# Allegro board DA_CONVERTOR.brd
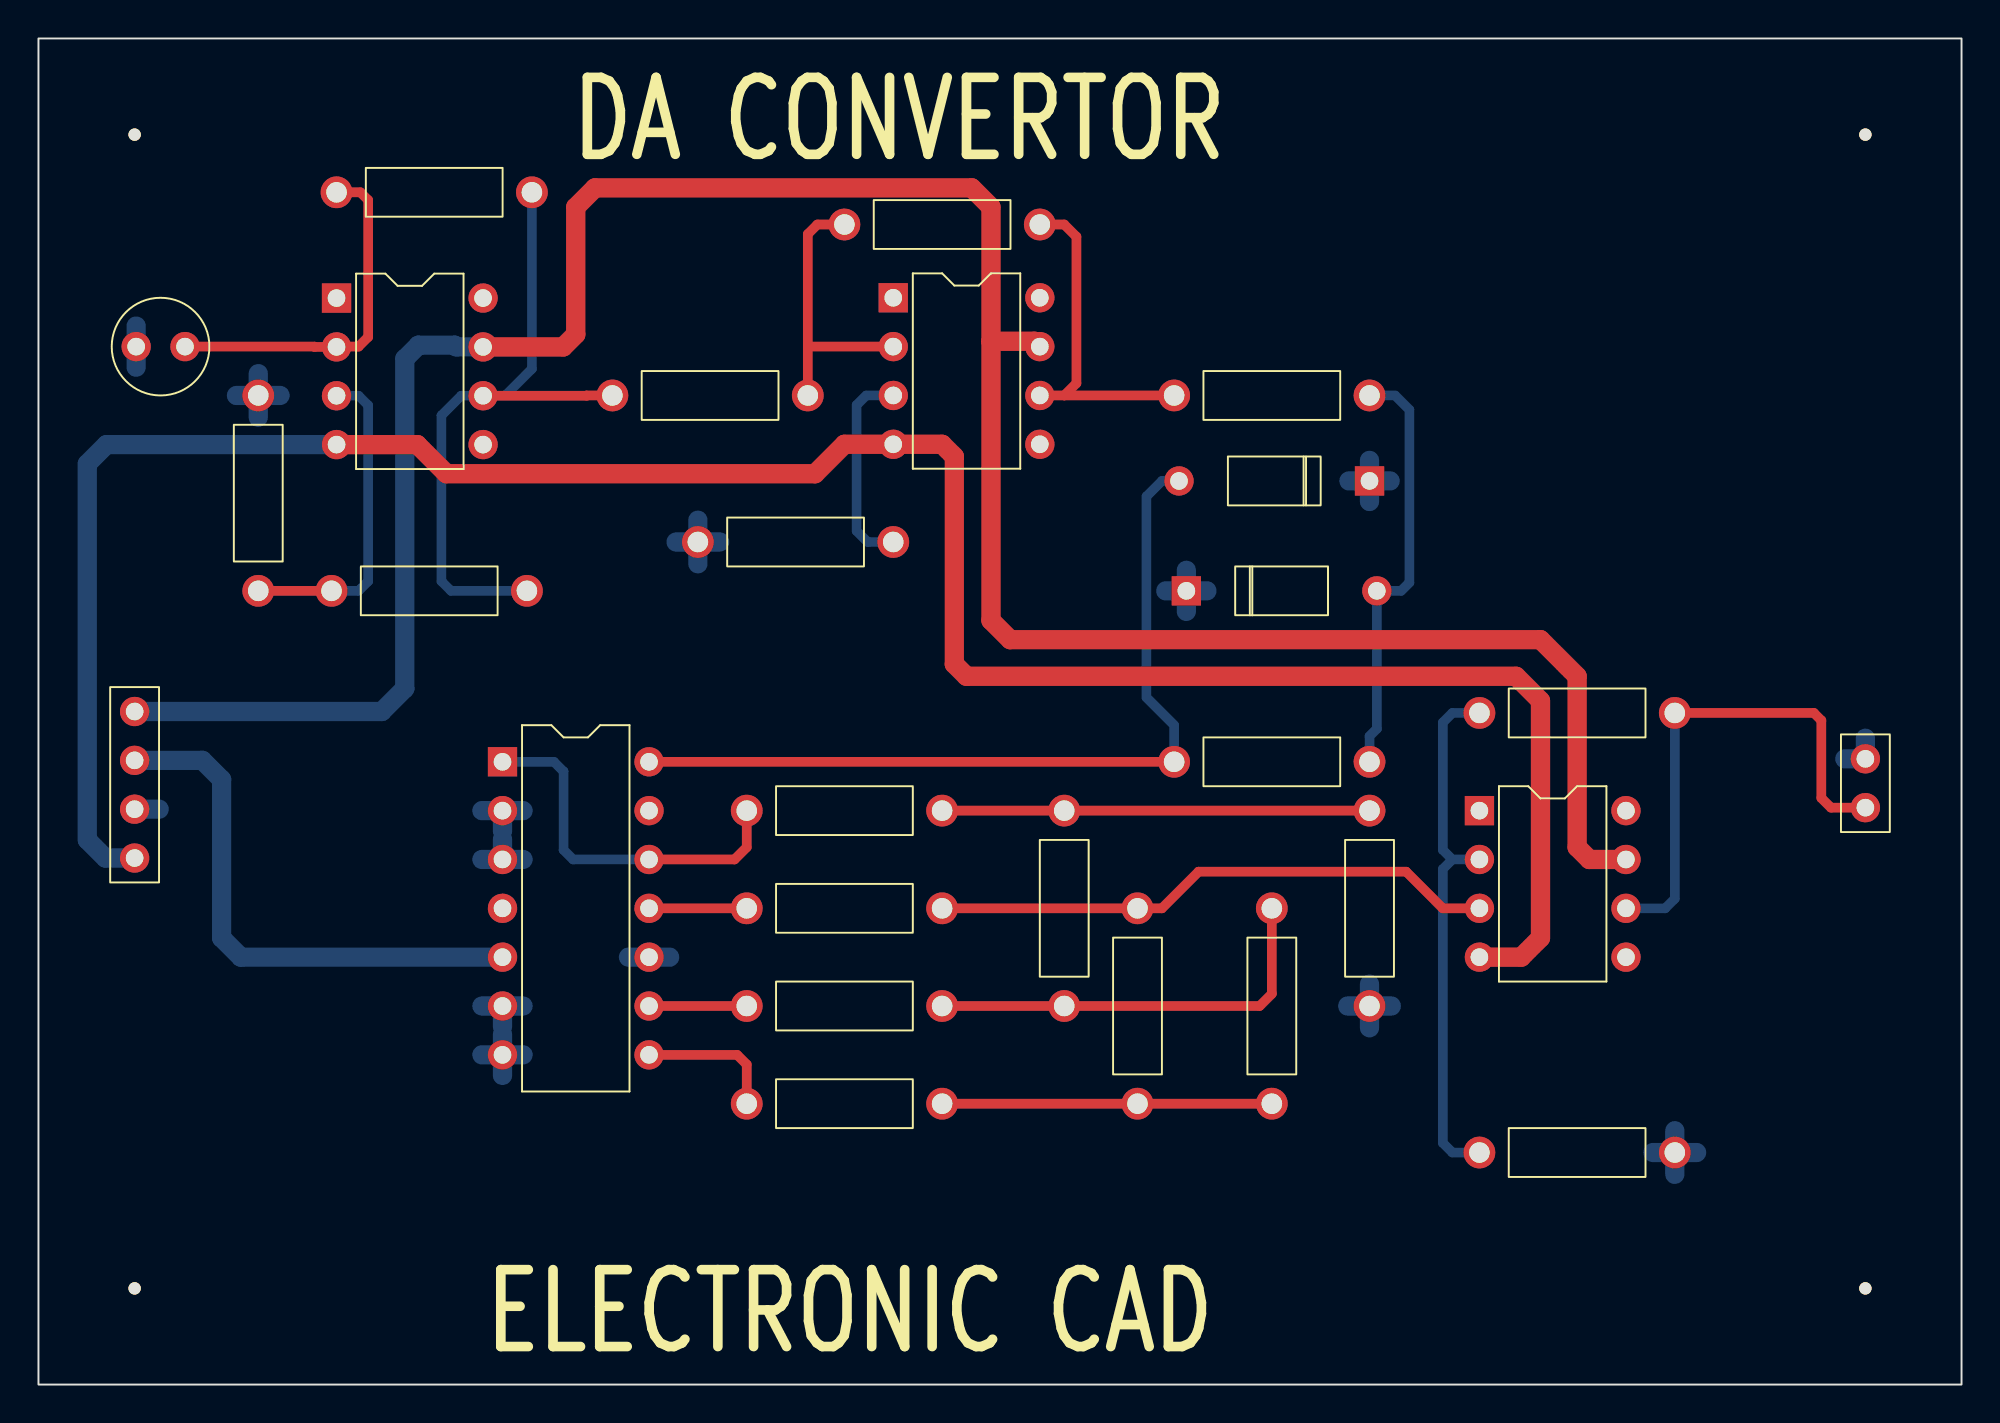
[diagram p0: board, top side]
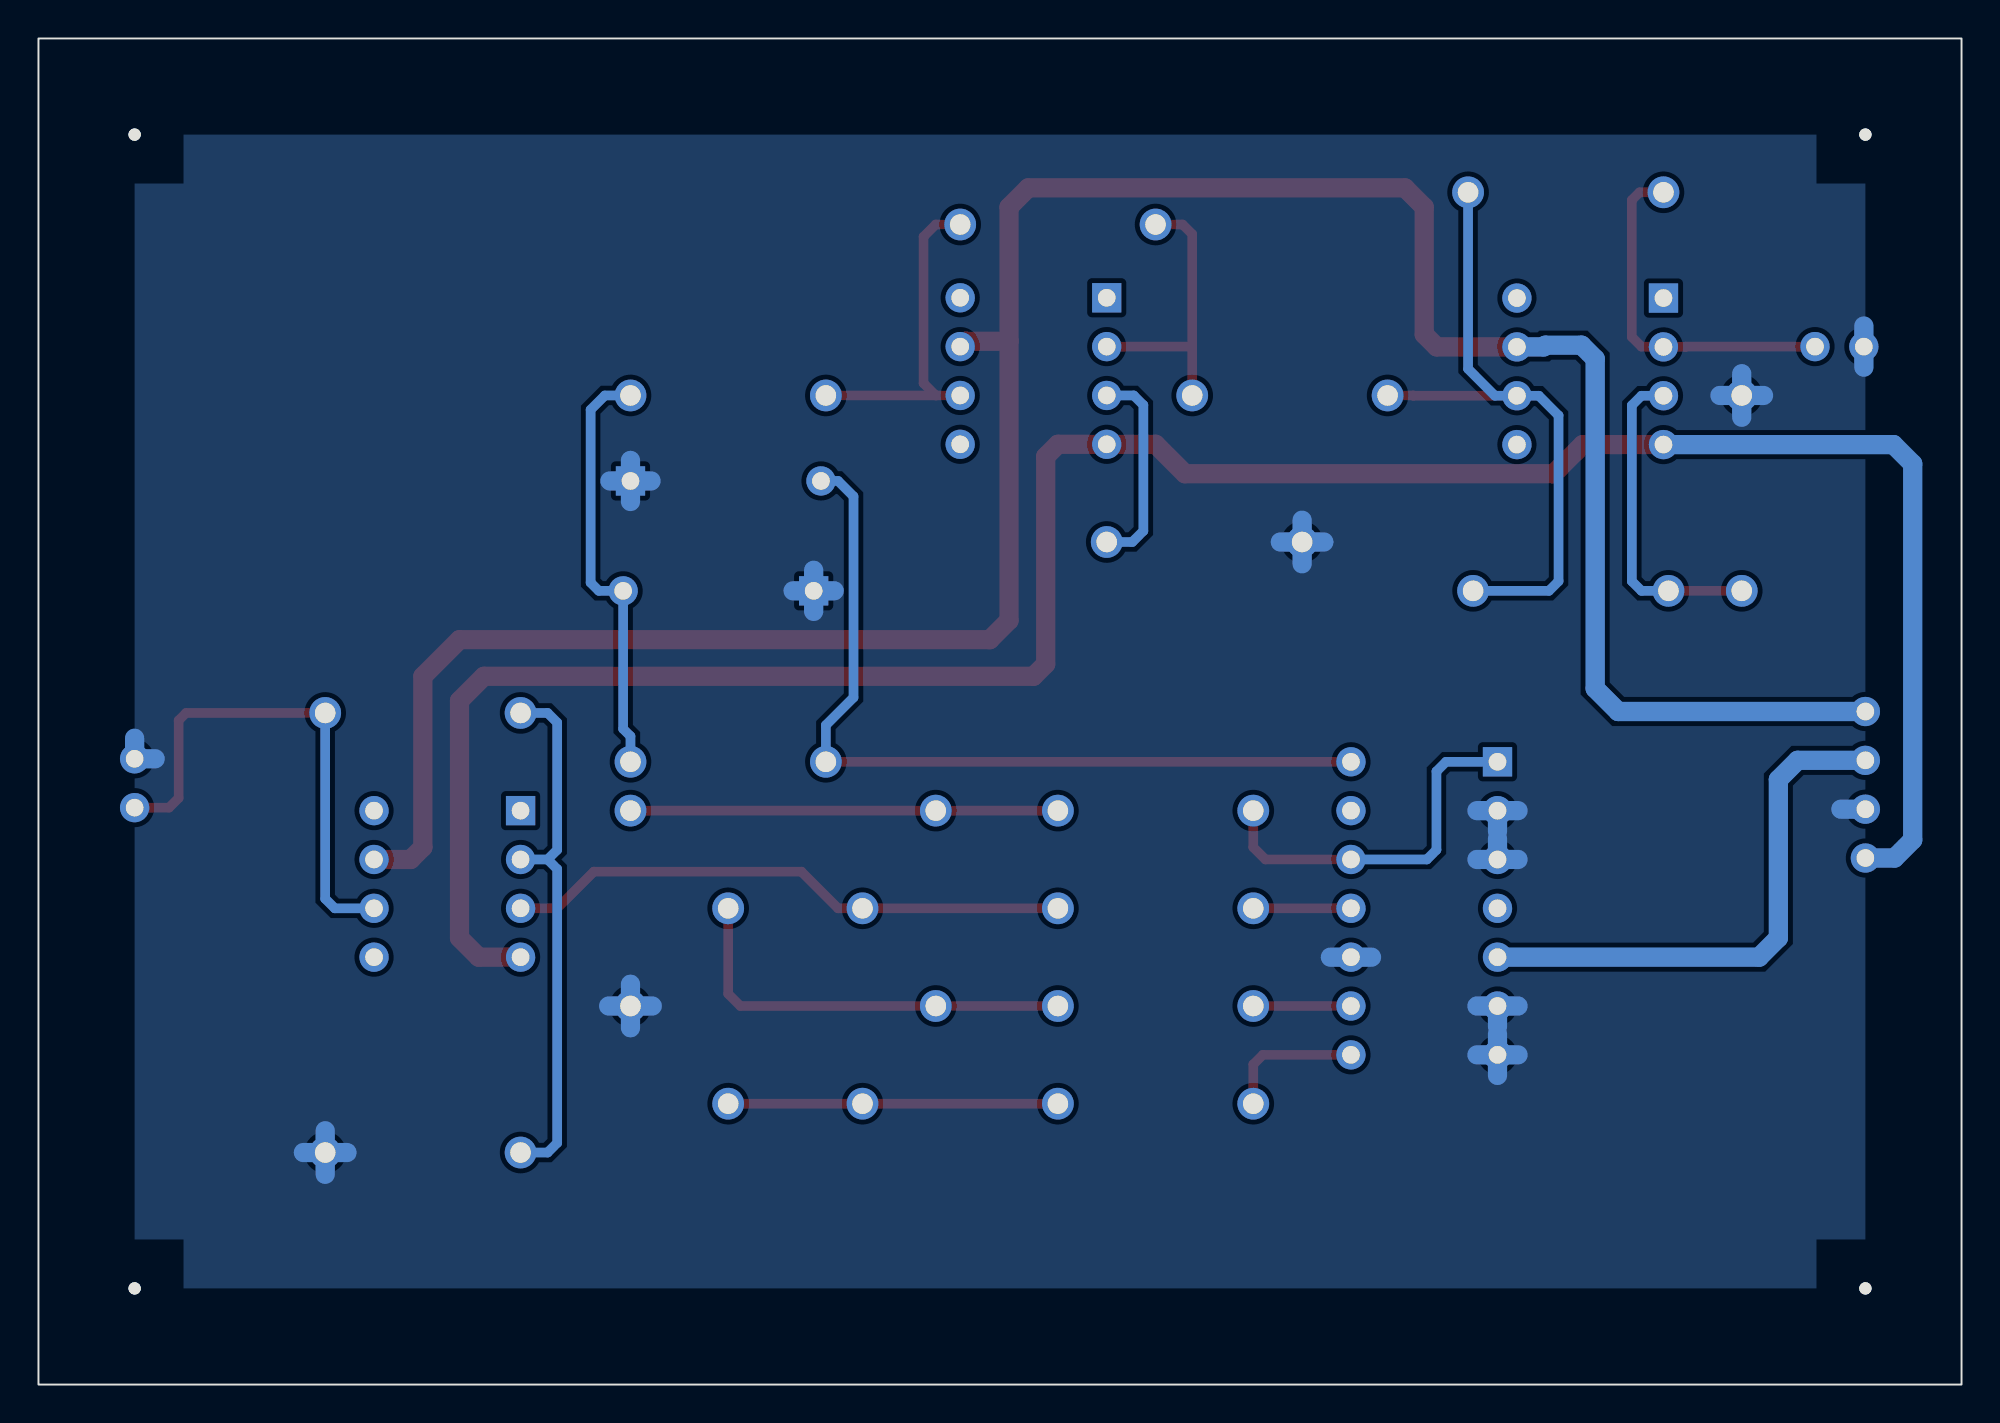
[diagram p1: board, bottom side, seen from below]

Outline 100 x 70 mm; copper layers: TOP, BOTTOM. Coordinates in mm from the lower left corner of the outline.
Outline path: rectangle 0,0 100,70

## Design rules (mm)
constraint set DEFAULT: min track width 0.5

## Placement (name value [footprint] x y rotation side)
C1  0.1uF  [CAP196]  5.08 53.98 270 top
D1  D1N4148  [DO41]  59.69 41.27 270 top
D2  RD 5.6A  [DO41]  69.22 46.99 90 top
J1  CON4  [JUMPER4]  5 35 270 top
J2  CON2  [JUMPER2]  95 30 90 top
NOREF  -  [unnamed]  5 5 0 top
NOREF#2  -  [#2]  100 0 90 top
NOREF#3  -  [unnamed]  5 65 0 top
NOREF#4  -  [unnamed]  95 5 0 top
NOREF#5  -  [#2]  0 70 0 top
NOREF#6  -  [unnamed]  95 65 0 top
R1  1K  [RES400]  11.43 41.27 0 top
R2  6.8K  [RES400]  25.4 41.27 90 top
R3  10K  [RES400]  15.5 62 270 top
R4  10K  [RES400]  29.84 51.44 270 top
R5  10K  [RES400]  34.29 43.81 270 top
R6  5.1K  [RES400]  41.91 60.33 270 top
R7  1K  [RES400]  59.05 51.44 270 top
R8  1K  [RES400]  69.22 32.38 90 top
R9  22K  [RES400]  36.83 24.77 270 top
R10  22K  [RES400]  36.83 14.61 270 top
R11  22K  [RES400]  36.83 19.68 270 top
R12  22K  [RES400]  36.83 29.84 270 top
R13  10K  [RES400]  57.15 14.61 0 top
R17  10K  [RES400]  85.09 12.06 90 top
R18  22K  [RES400]  74.93 34.92 270 top
R19  10K  [RES400]  64.14 24.77 180 top
R20  10K  [RES400]  53.34 29.84 180 top
R21  10K  [RES400]  69.22 19.68 0 top
U1  74LS90  [DIP14_3]  24.13 32.38 0 top
U2  LM741  [DIP8_3]  15.5 56.5 0 top
U3  LM741  [DIP8_3]  44.45 56.52 0 top
U4  LM741  [DIP8_3]  74.93 29.84 0 top

## Library data of the parts
C1 = C: Tolerance: ***; User Part Number: ***
D1 = 1N4148
D2 = RD100EB
J1 = CON4: User Part Number: ***
J2 = CON2: User Part Number: ***
R1-R13 R17-R21 = R: Tolerance: ***; User Part Number: ***
U1 = 74LS90_1: Tolerance: ***; User Part Number: ***
U2-U4 = LM741_0: Tolerance: ***; User Part Number: ***

## Footprints (pads in the part's own frame, mm; a bottom-side part is the same pattern mirrored in y, then rotated)
CAP196
  round 1.524 hole 0.914: 1(0,0) 2(0,2.54)
DIP8_3
  rect 1.524x1.524 hole 0.914: 1(0,0)
  round 1.524 hole 0.914: 2(0,-2.54) 3(0,-5.08) 4(0,-7.62) 5(7.62,-7.62) 6(7.62,-5.08) 7(7.62,-2.54) 8(7.62,0)
DIP14_3
  rect 1.524x1.524 hole 0.914: 1(0,0)
  round 1.524 hole 0.914: 2(0,-2.54) 3(0,-5.08) 4(0,-7.62) 5(0,-10.16) 6(0,-12.7) 7(0,-15.24) 8(7.62,-15.24) 9(7.62,-12.7) 10(7.62,-10.16) 11(7.62,-7.62) 12(7.62,-5.08) 13(7.62,-2.54) 14(7.62,0)
DO41
  rect 1.524x1.524 hole 0.914: 1(0,0)
  round 1.524 hole 0.914: 2(0,9.906)
JUMPER2
  round 1.524 hole 0.914: 1(0,0) 2(2.54,0)
JUMPER4
  round 1.524 hole 0.914: 1(0,0) 2(2.54,0) 3(5.08,0) 4(7.62,0)
RES400
  round 1.651 hole 1.067: 1(0,0) 2(0,10.16)
unnamed
  round 0.635 hole 3.175 unplated: (0,0)

## Nets
+5V: J1.2 U1.5(VCC)
+12V: J1.1 U2.7 U3.7 U4.7
-12V: J1.4 U2.4(V-) U3.4(V-) U4.4(V-)
GND: C1.1 D1.1 D2.1 J1.3 J2.2 R1.2 R5.1 R17.1 R21.1 U1.2 U1.3 U1.6 U1.7 U1.10
CLK: D2.2 R8.2 U1.14
OUT: J2.1 R18.2 U4.6
SIG: R9.2 R13.2 U4.3
N00971: C1.2 R3.1 U2.2
N00993: R1.1 R2.2 U2.3
N01028: R2.1 R3.2 R4.1 U2.6
N01140: R4.2 R6.1 U3.2
N01157: R5.2 U3.3
N01171: R6.2 R7.1 U3.6
N01192: D1.2 R7.2 R8.1
N01774: R12.1 U1.1 U1.12
N01840: R9.1 U1.11
N01852: R11.1 U1.9
N01856: R10.1 U1.8
N01897: R10.2 R13.1 R19.2
N01901: R11.2 R19.1 R20.2
N01905: R12.2 R20.1 R21.2
N01954: R17.2 R18.1 U4.2

Pads without a net: U1 4 13; U2 1 5 8; U3 1 5 8; U4 1 5 8

## Routing (per net, layer and track width the routed paths; a pad name or vN(x,y) marks a point on that pad's centre or on a via; arc(x,y) is an arc through that point)
+5V: length 28.2
  BOTTOM w1: U1.5 10.53,22.23 9.53,23.23 9.53,31.46 8.53,32.46 J1.2
+12V: length 137.7
  TOP w1: 49.53,54.25 51.79,54.25 U3.7 ; 49.53,54.25 49.53,61.23 48.53,62.23 28.94,62.23 27.94,61.23 27.94,54.61 27.29,53.96 U2.7 ; 49.53,54.25 49.53,39.73 50.53,38.73 78.11,38.73 80.01,36.83 80.01,27.94 80.64,27.3 U4.7
  BOTTOM w1: U2.7 21.73,53.96 21.64,54.05 19.76,54.05 19.05,53.34 19.05,36.2 17.86,35 J1.1
-12V: length 127.4
  TOP w1: U2.4 19.7,48.88 21.21,47.36 40.38,47.36 41.91,48.9 U3.4 46.99,48.9 47.62,48.26 47.62,37.47 48.26,36.83 76.83,36.83 78.11,35.56 78.11,23.23 77.11,22.23 U4.4
  BOTTOM w1: J1.4 3.48,27.38 2.54,28.32 2.54,47.88 3.54,48.88 U2.4
GND: length 48.3
  BOTTOM w1: U1.3 25.2,27.3 ; U1.3 23.06,27.3 ; U1.3 24.13,28.37 ; 83.96,12.06 R17.1 ; R17.1 86.22,12.06 ; R17.1 85.09,10.93 ; R17.1 85.09,13.2 ; 68.15,46.99 D2.1 ; D2.1 70.28,46.99 ; D2.1 69.22,45.92 ; D2.1 69.22,48.06 ; 33.16,43.81 R5.1 ; R5.1 34.29,42.68 ; R5.1 34.29,44.95 ; R5.1 35.42,43.81 ; 32.82,22.23 U1.10 30.68,22.23 ; 59.69,40.21 D1.1 ; D1.1 59.69,42.34 ; D1.1 60.76,41.27 ; D1.1 58.62,41.27 ; 24.13,18.62 U1.6 ; U1.6 23.06,19.68 ; U1.6 25.2,19.68 ; 24.13,16.08 U1.7 ; U1.7 23.06,17.14 ; U1.7 24.13,18.21 ; U1.7 25.2,17.14 ; 69.22,18.55 R21.1 ; R21.1 68.08,19.68 ; R21.1 70.35,19.68 ; R21.1 69.22,20.82 ; 10.3,51.44 R1.2 ; R1.2 11.43,50.3 ; R1.2 12.56,51.44 ; R1.2 11.43,52.57 ; 5.08,52.91 C1.1 5.08,55.04 ; U1.2 25.2,29.84 ; U1.2 24.13,28.78 ; U1.2 23.06,29.84 ; 95,33.61 J2.2 93.93,32.54 ; J1.3 6.28,29.92
CLK: length 43.7
  TOP w0.5: U1.14 R8.2
  BOTTOM w0.5: 59.31,46.99 58.42,46.99 57.62,46.19 57.62,35.73 59.05,34.29 R8.2
OUT: length 26.7
  TOP w0.5: R18.2 92.32,34.92 92.71,34.54 92.71,30.5 93.21,30 J2.1
  BOTTOM w0.5: U4.6 84.59,24.77 85.09,25.27 R18.2
SIG: length 29.5
  TOP w0.5: U4.3 73.03,24.77 71.12,26.67 60.33,26.67 58.42,24.77 R13.2 R9.2
N00971: length 18.7
  TOP w0.5: C1.2 14.35,53.98 14.36,53.96 U2.2 15.52,53.98 16.64,53.98 17.14,54.48 17.14,61.59 16.74,62 R3.1
N00993: length 16.9
  TOP w0.5: R1.1 R2.2
  BOTTOM w0.5: U2.3 16.64,51.42 17.14,50.92 17.14,41.77 16.64,41.27 R2.2
N01028: length 34.9
  TOP w0.5: U2.6 28.5,51.42 28.52,51.44 R4.1
  BOTTOM w0.5: R2.1 21.45,41.27 20.95,41.77 20.95,50.4 21.98,51.42 U2.6 24.26,51.42 25.66,52.82 R3.2
N01140: length 15
  TOP w0.5: 40.01,53.9 R4.2 ; 40.01,53.9 40.01,59.83 40.51,60.33 R6.1 ; 40.01,53.9 40.08,53.98 U3.2
N01157: length 10.8
  BOTTOM w0.5: U3.3 43.05,51.44 42.55,50.94 42.55,44.39 43.12,43.81 R5.2
N01171: length 17.7
  TOP w0.5: 53.34,51.44 53.98,52.07 53.98,59.69 53.34,60.33 R6.2 ; 53.34,51.44 R7.1 ; 53.34,51.44 U3.6
N01192: length 22.3
  BOTTOM w0.5: R7.2 70.55,51.44 71.29,50.69 71.29,41.7 70.86,41.27 D1.2 69.6,34.1 69.22,33.72 R8.1
N01774: length 19.4
  TOP w0.5: R12.1 36.83,27.94 36.2,27.3 U1.12
  BOTTOM w0.5: U1.1 26.8,32.38 27.3,31.89 27.3,27.8 27.8,27.3 U1.12
N01840: length 5.1
  TOP w0.5: U1.11 R9.1
N01852: length 5.1
  TOP w0.5: U1.9 R11.1
N01856: length 7.3
  TOP w0.5: U1.8 36.33,17.14 36.83,16.64 R10.1
N01897: length 17.1
  TOP w0.5: R10.2 R13.1 R19.2
N01901: length 21.9
  TOP w0.5: R19.1 64.14,20.32 63.5,19.68 R20.2 R11.2
N01905: length 22.2
  TOP w0.5: R21.2 R20.1 R12.2
N01954: length 27.9
  BOTTOM w0.5: 73.53,27.3 73.03,26.8 73.03,12.56 73.53,12.06 R17.2 ; 73.53,27.3 U4.2 ; 73.53,27.3 73.03,27.8 73.03,34.42 73.53,34.92 R18.1

## Copper pours and planes (outline as drawn; the poured copper is in the pictures)
GND on BOTTOM: 5,5 5,65 95,65 95,5

## Text on the board
Ref Des/Silkscreen Top: ELECTRONIC CAD | DA CONVERTOR
TOLERANCE_TOP: FIGURE | FINISHED_SIZE | 0.914 | 1.067 | 3.175 | DRILL CHART: TOP to BOTTOM | ALL UNITS ARE IN MILLIMETERS | PLATED | NON-PLATED | QTY | 50 | 36 | 4
